# Altium PCB ECG_old.PcbDoc
Units mil, origin at the board's own origin, x right, y up, seen from the top; angles counter-clockwise.
Board outline 4300 x 1385 mil, 2 copper layers (Top Layer, Bottom Layer); 20 components, 18 nets, 62 pads, 5 vias.
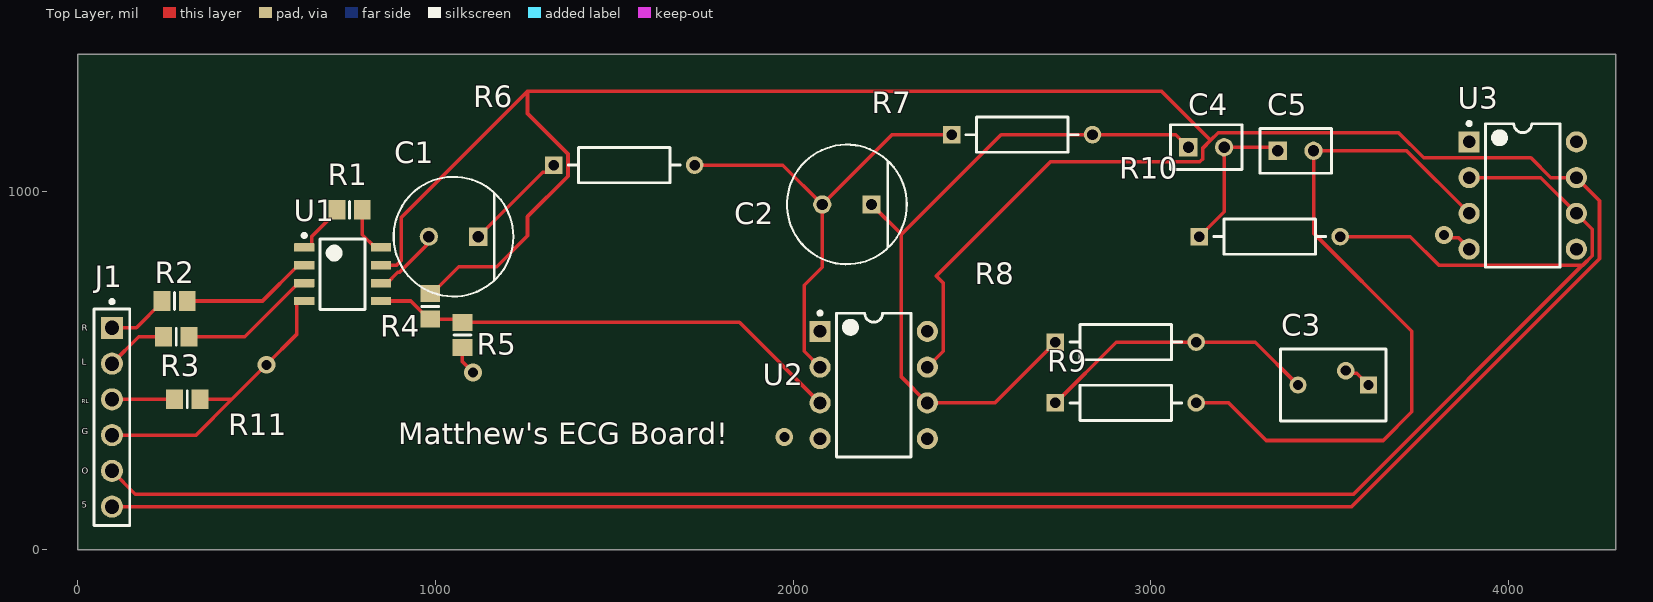
[diagram p0: Top Layer view]
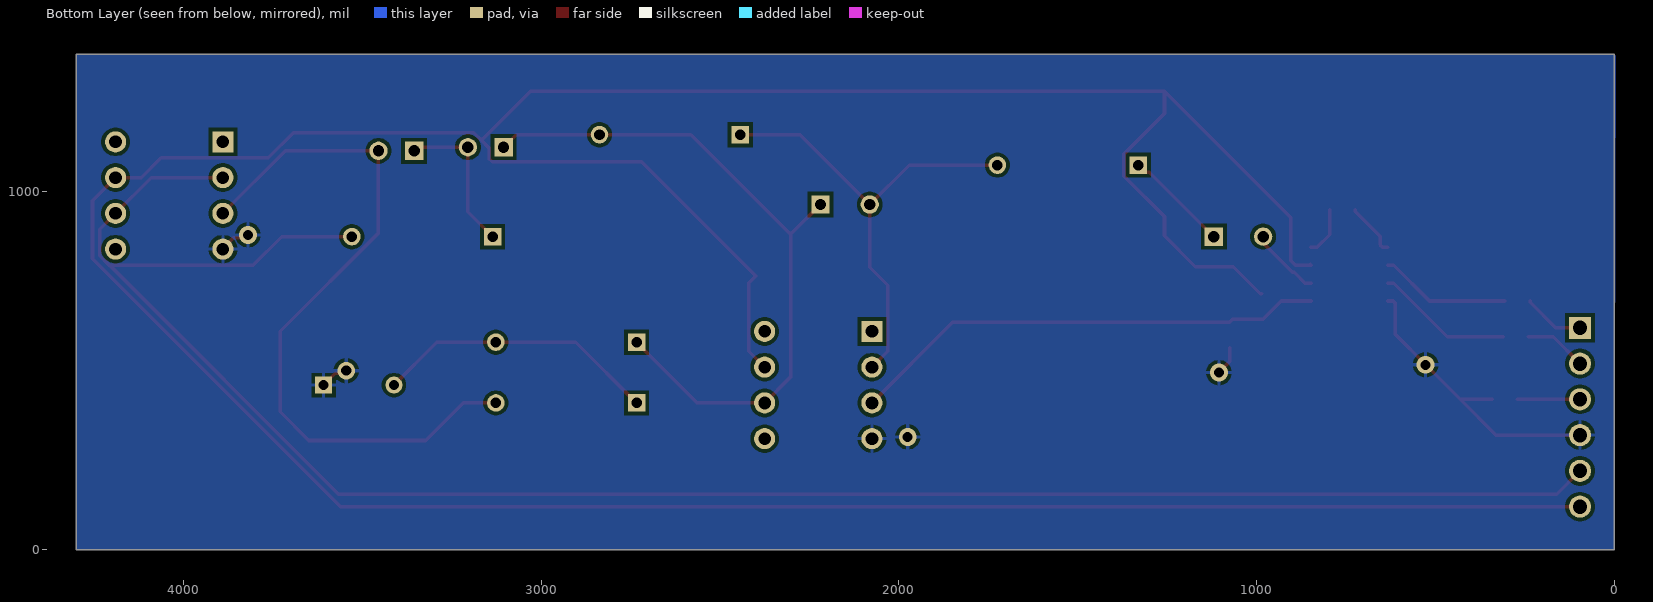
[diagram p1: Bottom Layer view, seen from below]
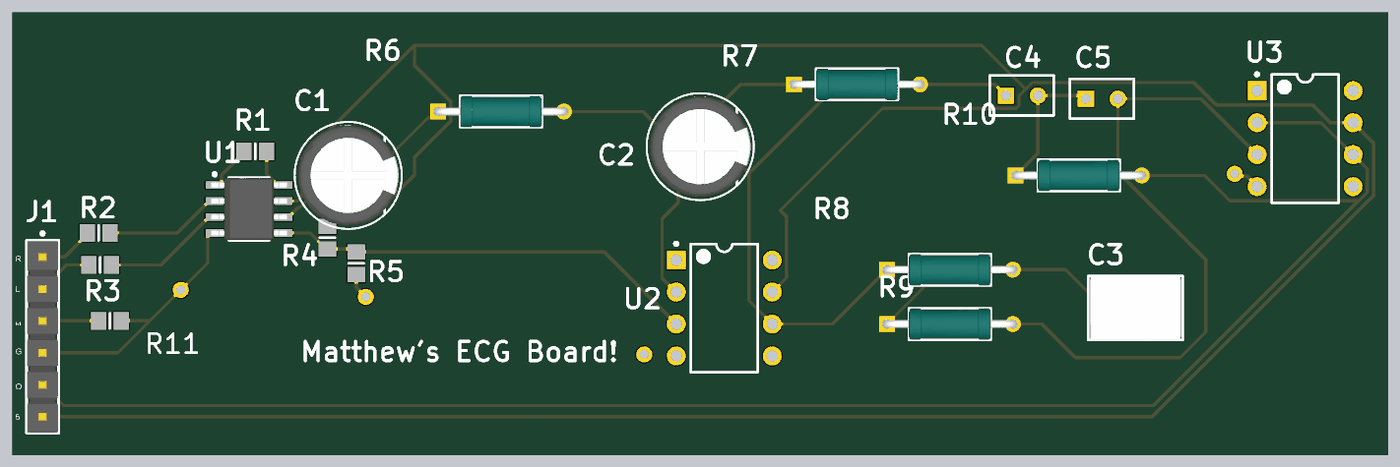
[diagram p2: 3D render of the assembled board from above, using the file's embedded part models]

## Layer stack, top to bottom
Top Solder: solder mask 0.4, Solder Resist, Dk 3.5
Top Layer: signal copper 1.4
Dielectric 1: dielectric 12.6, FR-4, Dk 4.8
Bottom Layer: signal copper 1.4
Bottom Solder: solder mask 0.4, Solder Resist, Dk 3.5

## Board outline
0,0 4300,0 4300,1385 0,1385

## Design rules (kind name [scope] priority, off if disabled: settings)
Clearance [All] p1: gap=10 ignorepadtopadclearanceinfootprint=FALSE except(0: Arc-Hole Track-Hole SMDPad-Hole THPad-Hole Via-Hole Fill-Hole Poly-Hole Region-Hole Text-Hole)
PolygonConnect [All] p1: connectstyle=Relief reliefconductorwidth=10 reliefentries=4 polygonreliefangle="90 Angle" airgapwidth=10
RoutingVias [All] p1: holewidth=28 width=50 viastyle="Through Hole" minholewidth=28 minwidth=50 maxholewidth=28 maxwidth=50
SolderMaskExpansion [All] p1: expansion=4 istentingtop=FALSE
Width [All] p1: maxlimit=10 minlimit=10 preferedwidth=10
30 further rules are at their usual default settings.

## Components (designator, comment, footprint, x,y, rotation, side; value= is the part's Value field where it differs from the comment)
C1 "47u" FP-RAD-TH-D_8_0_5-L_20_2-MFG 1050,875 r180 top
C2 "47u" FP-RAD-TH-D_8_0_5-L_20_2-MFG 2150,965 r180 top
C3 "200n" FP-R82DC4100DQ60J-MFG 3510,460 r180 top
C4 "100n" CAPR51-254-508X318X736 3155,1125 r0 top
C5 "100n" CAPR51-254-508X318X736 3405,1115 r0 top
J1 "HTSW-106-07-G-S" FP-HTSW-106-07-G-S-MFG 95,370 r270 top
R1 "Res 0805" 6-0805_N 759.57,950 r0 top value=2000
R2 "Res 0805" 6-0805_N 270,695 r0 top value=100k
R3 "Res 0805" 6-0805_N 275,595 r0 top value=100k
R4 "Res 0805" 6-0805_N 985,680 r90 top value=10k
R5 "Res 0805" 6-0805_N 1075,600 r90 top value=10k
R6 "100k" FP-MRS25-MFG 1527.36,1075 r0 top
R7 "100k" FP-MRS25-MFG 2640,1160 r0 top
R8 "1.655k" FP-MRS25-MFG 2930,580 r0 top
R9 "424k" FP-MRS25-MFG 2930,410 r0 top
R10 "1.655k" FP-MRS25-MFG 3332.64,875 r0 top
R11 "Res 0805" 6-0805_N 305.43,420 r0 top value=100k
U1 "INA126UA/2K5" D0008A_N 740,770 r0 top
U2 "LM741CN" P0008A 2225,460 r0 top
U3 "LM741CN/NOPB" P0008A 4040,990 r0 top

## Footprints (in the part's own frame and the unit in brackets; to place one, negate y for a bottom-side part, rotate by r counter-clockwise, add the part's x,y. Pads: shape width x height; smd on the part's side, far side on the other; paste and mask are expansions set on the pad)
6-0805_N [mm]
  rect 1.2x1.4 smd: 1(-0.9,0) 2(0.9,0)
  silkscreen extent 0,-0.6 0,0.6, body extent -1.07,-0.7 1.07,0.7, height 0.7
CAPR51-254-508X318X736 [mm] "THD, 2-Leads, Body 5.08x3.18mm"
  rect 1.3x1.3 hole 0.8: 1(-1.27,0)
  round 1.3 hole 0.8: 2(1.27,0)
  silkscreen extent -2.54,-1.59 2.54,1.59, body extent -2.54,-1.59 2.54,1.59, height 7.36
D0008A_N [mm] "SOIC, 8-Leads, Body 5x4mm, Pitch 1.27mm, IPC Medium Density"
  rrect17% 1.45x0.6 smd: 1(-2.725,1.905) 2(-2.725,0.635) 3(-2.725,-0.635) 4(-2.725,-1.905) 5(2.725,-1.905) 6(2.725,-0.635) 7(2.725,0.635) 8(2.725,1.905)
  silkscreen extent -2.85,-2.5 1.6,2.88, body extent -3,-2.45 3,2.45, height 1.63
FP-HTSW-106-07-G-S-MFG [mm]
  rect 1.57x1.57 hole 1.02 paste-2539.97 mask+0: 1(-6.35,0)
  round 1.57 hole 1.02 paste-2539.97 mask+0: 2(-3.81,0) 3(-1.27,0) 4(1.27,0) 5(3.81,0) 6(6.35,0)
  silkscreen extent -8.33,-1.27 7.68,1.27, body extent -7.78,-1.37 7.78,1.37, height 0.25
FP-MRS25-MFG [mm]
  rect 1.25x1.25 hole 0.75 paste-2539.97 mask+0: 1(-5,0)
  round 1.25 hole 0.75 paste-2539.97 mask+0: 2(5,0)
  silkscreen extent -3.98,-1.25 3.98,1.25, body extent -5.72,-1.35 5.72,1.35, height 0.25
FP-R82DC4100DQ60J-MFG [mm]
  rect 1.2x1.2 hole 0.7 paste-2539.97 mask+0: 1(-2.5,0)
  round 1.2 hole 0.7 paste-2539.97 mask+0: 2(2.5,0)
  silkscreen extent -3.75,-2.55 3.75,2.55, body extent -3.85,-2.65 3.85,2.65, height 0.25
FP-RAD-TH-D_8_0_5-L_20_2-MFG [mm]
  rect 1.3x1.3 hole 0.8 paste-2539.97 mask+0: 1(-1.75,0)
  round 1.3 hole 0.8 paste-2539.97 mask+0: 2(1.75,0)
  silkscreen extent -4.25,-4.25 4.25,4.25, body extent -4.35,-4.35 4.35,4.35, height 0.25
P0008A [mm] "DIP, 8-Leads, Body 10.15x6.6mm, Pitch 2.54mm"
  rect 1.5x1.5 hole 0.9: 1(-3.81,3.81)
  round 1.5 hole 0.9: 2(-3.81,1.27) 3(-3.81,-1.27) 4(-3.81,-3.81) 5(3.81,-3.81) 6(3.81,-1.27) 7(3.81,1.27) 8(3.81,3.81)
  silkscreen extent -3.93,-5.1 2.65,5.23, body extent -3.95,-5.07 3.95,5.07, height 5.08

## Part data
C1 C2: library part CMP-05427-001204-1, "Aluminum Electrolytic Capacitors (Radial Lead Type) AEC-Q200 Qualified 270uF ±20% 35V"
C3: library part CMP-03022-000017-1, "CAP FILM 1UF 5% 63VDC RADIAL", Capacitance=1uF, Case/Package=Radial, Dielectric=PET, Insulation Resistance=30R, Max Operating Temperature=105°C, Min Operating Temperature=-55°C, Package Quantity=1700, Tolerance=5%, Voltage=63V, Voltage Rating (AC)=40V, Construction=RADIAL, Contact Plating=Tin, Depth=5mm, Dielectric Material=PET, Dissipation Factor=80%, Height - Seated (Max)=0.398inch, Lead Diameter=0.5mm, Lead Pitch=5mm, Length=7.2mm, Life (Hours)=2000Hour, Mount="Through Hole", Packaging="Tape and Reel", Radiation Hardening=No, REACH SVHC="No SVHC", RoHS Compliant=Yes, Series=R82, Termination=Radial, Type="General Purpose", Voltage Rating=63V, Voltage Rating (DC)=63V, Width=5mm
C4 C5: library part CMP-1664-00004-1, "Radial Leaded Multilayer Ceramic Capacitor, 0.1 uF, +/- 10%, 50 V, -55 to 125 degC, 2-Pin THD, RoHS, Tape and Reel", Case\Package=SOT-23-5, Dropout Voltage="260 mV", Max Input Voltage="8 V", Max Operating Temperature="85 degC", Max Power Dissipation="250 mW", Min Operating Temperature="-40 degC", Output Current="150 mA", Output Voltage="5 V", Package Quantity=3000, ComponentLink1Description="Manufacturer URL", ComponentLink1URL=http://www.kemet.com/, ComponentLink2Description=Datasheet, ComponentLink2URL=http://www.kemet.com/docfinder?Partnumber=C320C104K5R5TA, DatasheetVersion=Dec-15, Height="1.3 mm", Length="3 mm", Mount="Surface Mount", Outputs=1, PackageDescription="2-Pin Through Hole Device, Body 5.08 x 3.18 mm, Pitch 2.54 mm", PackageReference=CAPR51-254-508X318X736, Packaging="Tape and Reel", Pins=5, Radiation Hardening=No, RoHSCompliant=true, Width="1.8 mm"
J1: library part CMP-02766-001515-1, "CONN HEADER VERT 6POS 2.54MM", Color=Natural, Flammability Rating="UL94 V-0", Max Current Rating=7.6A, Max Operating Temperature=125°C, Max Voltage Rating (AC)=550V, Min Operating Temperature=-55°C, Connector Type=Header, Contact Finish - Mating=GOLD, Contact Material=Bronze, Contact Mating Length=0.23inch, Contact Plating=Gold, Contact Shape=Square, Contact Type="Male Pin", Depth=2.48mm, Fastening Type=Pull, Gender=Male, Housing Color=Natural, Housing Material=Polymer, Insulation Color=Natural, Insulation Material=Polymer, Lead Free="Lead Free", Length=15.24mm, Mount="Through Hole", Number of Contacts=6, Number of Positions=6, Number of Rows=1, Orientation=Straight, Packaging=Rail/Tube, Pitch=0.1inch, Radiation Hardening=No, REACH SVHC="No SVHC", RoHS Compliant=Yes, Series=HTSW, Termination=Solder
R1 R2 R3 R4 R5 R11: library part CMP-009-00180-12, "Resistor", Case/Package=0805, Power=125mW, Component Type=Standard, Design Item ID=Res1, LatestRevisionDate=17-Jul-2002, LatestRevisionNote="Re-released for DXP Platform.", PackageReference=AXIAL-0.3, Pins=2, Published=8-Jun-2000, Publisher="Altium Limited", Source="PCB Footprint.SCHLIB"
R6 R7 R8 R9 R10: library part CMP-00030-42757237-1, "MRS25000C1000FRP00 Resistor, 100 Ohm, ± 1%, 600 mW, Axial Leaded, Metal Film (Thin Film), Professional", Case/Package=Axial, Max Operating Temperature=155°C, Max Power Dissipation=600mW, Min Operating Temperature=-55°C, Resistance=100Ω, Temperature Coefficient=50ppm/°C, Tolerance=1%, Voltage Rating=350V, Composition="Metal Film, Thin Film", Contact Plating=Tin, Diameter=2.5mm, Lead Diameter=600µm, Lead Free="Lead Free", Length=6.5mm, Military Standard=Not, Mount="Through Hole", NexarPartId=42757237, Number of Pins=2, Number of Terminations=2, Packaging="Tape & Reel (TR)", Power Rating=600mW, Radiation Hardening=No, REACH SVHC=Unknown, RoHS=Compliant, Schedule B="8533210090, 8533210090", Termination=Axial, Voltage Rating (DC)=350V, Width=2.5mm
U1: library part CMP-0992-00053-2, "Micropower Instrumentation Amplifier Single and Dual Versions, -40 to 85 degC, 8-pin SOIC (D8), Green (RoHS & no Sb/Br)", Input Bias Current (+/-)(Max)(nA)=50, Manufacturer="Texas Instruments", Quiescent Current (+/-)(Typ)(mA)=0.175, CMRR(Min)(dB)=74, Code_JEDEC=MS-012, ComponentLink1Description="Manufacturer URL", ComponentLink1URL=http://www.ti.com/, ComponentLink2Description=Datasheet, ComponentLink2URL=http://www.ti.com/general/docs/lit/getliterature.tsp?genericPartNumber=INA126&fileType=pdf, ComponentLink3Description="Package Specification", ComponentLink3URL=http://www.ti.com/litv/pdf/msoi002j, DatasheetVersion=SBOS062A, Eco-Plan="Green (RoHS & no Sb/Br)", Gain(V/V)="5 to 10000", Input Offset (+/-)(Max)(uV)=500, Input Offset Drift (+/-)(Max)(uV/Degrees Celsius)=5, Mounting Technology="Surface Mount", Noise at 1kHz(Typ)(nV/rt(Hz))=35, Non-Linearity (+/-)(Max)(%)=0.012, Number of Channels=1, PackageDescription="8-Pin Plastic Small Outline, Body 4.9 x 3.9 mm, Pitch 1.27 mm", PackageReference=D0008A, PackageVersion="4040047-3/M, 06/2011", PartNumber=INA126UA/2K5, SubFamily="Dual Supply", Vs(Max)(V)=36, Vs(Min)(V)=2.7
U2 U3: library part CMP-0055-00162-3, "Operational Amplifier, 8-pin MDIP, Pb-Free", Manufacturer="Texas Instruments", Package Reference=P0008A, PackageTopMarking=NSUZXYTTE#*LM*741CN, PowerWise=N, Code_JEDEC=MS-001-BA, ComponentLink1Description="Datasheet URL", ComponentLink1URL=http://www.ti.com/general/docs/lit/getliterature.tsp?genericPartNumber=LM741&fileType=pdf, CompType=Amplifiers, PackageDescription="MDIP, .365 x .250 x .130in, 8 Lead, .100in Pitch", PinCount=8, RoHS=Y

## Via types
v1: diameter 50, hole 28, Top Layer to Bottom Layer, 5 vias

## Nets (pads, with @x,y where several pads share a name; then routed paths per layer and width w, separated by ;. In a path a pad name is that pad's centre, name@x,y a point inside that pad or via, vN(x,y) a via of type N, cw(c..) or ccw(c..) an arc to the next point about the centre after c; other vN are vias at no path point)
+5: J1.6 R4.2 U1.7 U2.7 U3.7 | length 10491.2
  Top Layer w10: J1.6 3561.26,120 4254.53,813.27 4254.53,975.47 U3.7 4118.28,1040 4062.81,1095.47 3762.81,1095.47 3692.69,1165.59 3188.19,1165.59 3166.89,1144.29 ; U1.7 U1.7@849.78,797.5 ; U1.7@852.28,795 890.83,795 904.52,808.69 904.52,929 1257.02,1281.5 ; R4.2 988.94,715.43 1064.62,791.12 1171.12,791.12 1257.02,877.02 1257.02,931.08 1370.12,1044.18 1370.12,1106.29 1257.02,1219.39 1257.02,1281.5 ; U2.7 2419.53,554.53 2419.53,745.47 2400,765 2719.41,1084.41 3136.8,1084.41 3145.59,1093.2 3145.59,1122.99 3166.89,1144.29 ; 1257.02,1281.5 3029.69,1281.5 3166.89,1144.29
ADC_Out: J1.5 R10.2 U3.2 U3.6 | length 5631.5
  Top Layer w10: J1.5 160,155 3566.72,155 4207.19,795.47 ; R10.2 3725.28,875 3804.8,795.47 4208.44,795.47 4234.53,821.56 4234.53,895.47 U3.6 4090,1040 U3.2
GND: C3.1 J1.4 R5.1 R11.2 U1.4 U2.4 U3.4 | length 1082.8
  Top Layer w10: J1.4 330,320 430,420 ; R11.2 430,420 ; U1.4 617.99,695 611.18,688.19 611.18,601.18 v1(526.72,516.72) 430,420 ; R5.1 1075,525 v1(1105,495) ; v1(3545,500) 3552.24,492.76 3575.66,492.76 C3.1 ; v1(3820,880) 3827.58,872.42 3859.45,872.42 3890,841.87 U3.4
  other v1: 1975,315
LeftElectrode: J1.2 R3.1 | length 175.6
  Top Layer w10: J1.2 170,595 R3.1
NetC1_1: C1.1 R6.1 | length 294.5
  Top Layer w10: C1.1 1299.29,1055.39 1310.91,1055.39 R6.1
NetC1_2: C1.2 U1.6 | length 198.2
  Top Layer w10: U1.6 864.02,745 894.02,775 899.11,775 973.22,849.11 973.22,867.12 C1.2
NetC2_1: C2.1 C4.1 R7.2 R8.1 U2.6 | length 1980.6
  Top Layer w10: C2.1 2302.55,881.35 ; R8.1 2563.15,410 U2.6 2302.55,482.45 2302.55,881.35 ; C4.1 3070,1160 R7.2 2581.2,1160 2302.55,881.35
NetC2_2: C2.2 R6.2 R7.1 U2.2 | length 1339.7
  Top Layer w10: R6.2 1971.1,1075 C2.2 ; U2.2 2030.47,554.53 2030.47,738.74 2081.1,789.37 C2.2 ; R7.1 2276.1,1160 C2.2
NetC3_2: C3.2 R8.2 R9.1 | length 798.5
  Top Layer w10: R9.1 2903.15,580 R8.2 3291.57,580 C3.2
NetC4_2: C4.2 C5.1 R10.1 | length 432.8
  Top Layer w10: R10.1 3205,944.21 C4.2 3345,1125 C5.1
NetC5_2: C5.2 R9.2 U3.3 | length 2035.6
  Top Layer w10: R9.2 3217.64,410 3322.64,305 3650,305 3730,385 3730,610 3455,885 C5.2 3715,1115 U3.3
  Bottom Layer w10: R9.2 R9.2@3130,406.85
NetR1_1: R1.1 U1.1 | length 151.5
  Top Layer w10: U1.1 647.44,845 654.25,851.81 654.25,876.18 724.13,946.06 R1.1
NetR1_2: R1.2 U1.8 | length 136.5
  Top Layer w10: R1.2 795,880.55 830.55,845 U1.8
NetR2_2: R2.2 U1.2 | length 368.7
  Top Layer w10: R2.2 515.98,695 615.98,795 U1.2
NetR3_2: R3.2 U1.3 | length 384.4
  Top Layer w10: R3.2 465.98,595 615.98,745 U1.3
NetR4_1: R4.1 R5.2 U1.5 U2.3 | length 1345.8
  Top Layer w10: U1.5 930.63,695 981.06,644.57 R4.1 1065.87,644.57 R5.2 1849.57,635.43 U2.3
RightElectrode: J1.1 R2.1 | length 172.9
  Top Layer w10: J1.1 163.5,620 234.57,691.06 R2.1
RightLegInput: J1.3 R11.1 | length 175
  Top Layer w10: J1.3 R11.1
pads on no net: U2.1 U2.5 U2.8 U3.1 U3.5 U3.8

## Polygon pours and split planes (outlines as drawn)
GND on Bottom Layer "GND_L02_P000" (solid, remove dead copper, pour order 0): 4300,1385 -4.88,1385 0,0 4300,0

## Silkscreen, mask and mechanical layers (free items; w line width, h text height)
Top Overlay:
  text "R" at 10,605 h30
  text "L" at 10,510 h30
  text "RL" at 10,405 h20
  text "G" at 10,315.33 h30
  text "Matthew's ECG Board!" at 895,295 h60
  text "O" at 10,205.33 h30
  text "5" at 10,110.33 h30